# Altium PCB Diesel_control.PcbDoc
Units mm, origin at the board's own origin, x right, y up, seen from the top; angles counter-clockwise.
Board outline 132.63 x 61.4 mm, 2 copper layers (Top Layer, Bottom Layer); 96 components, 69 nets, 314 pads, 0 vias.
Unrouted connection lines stored in the file: 178.
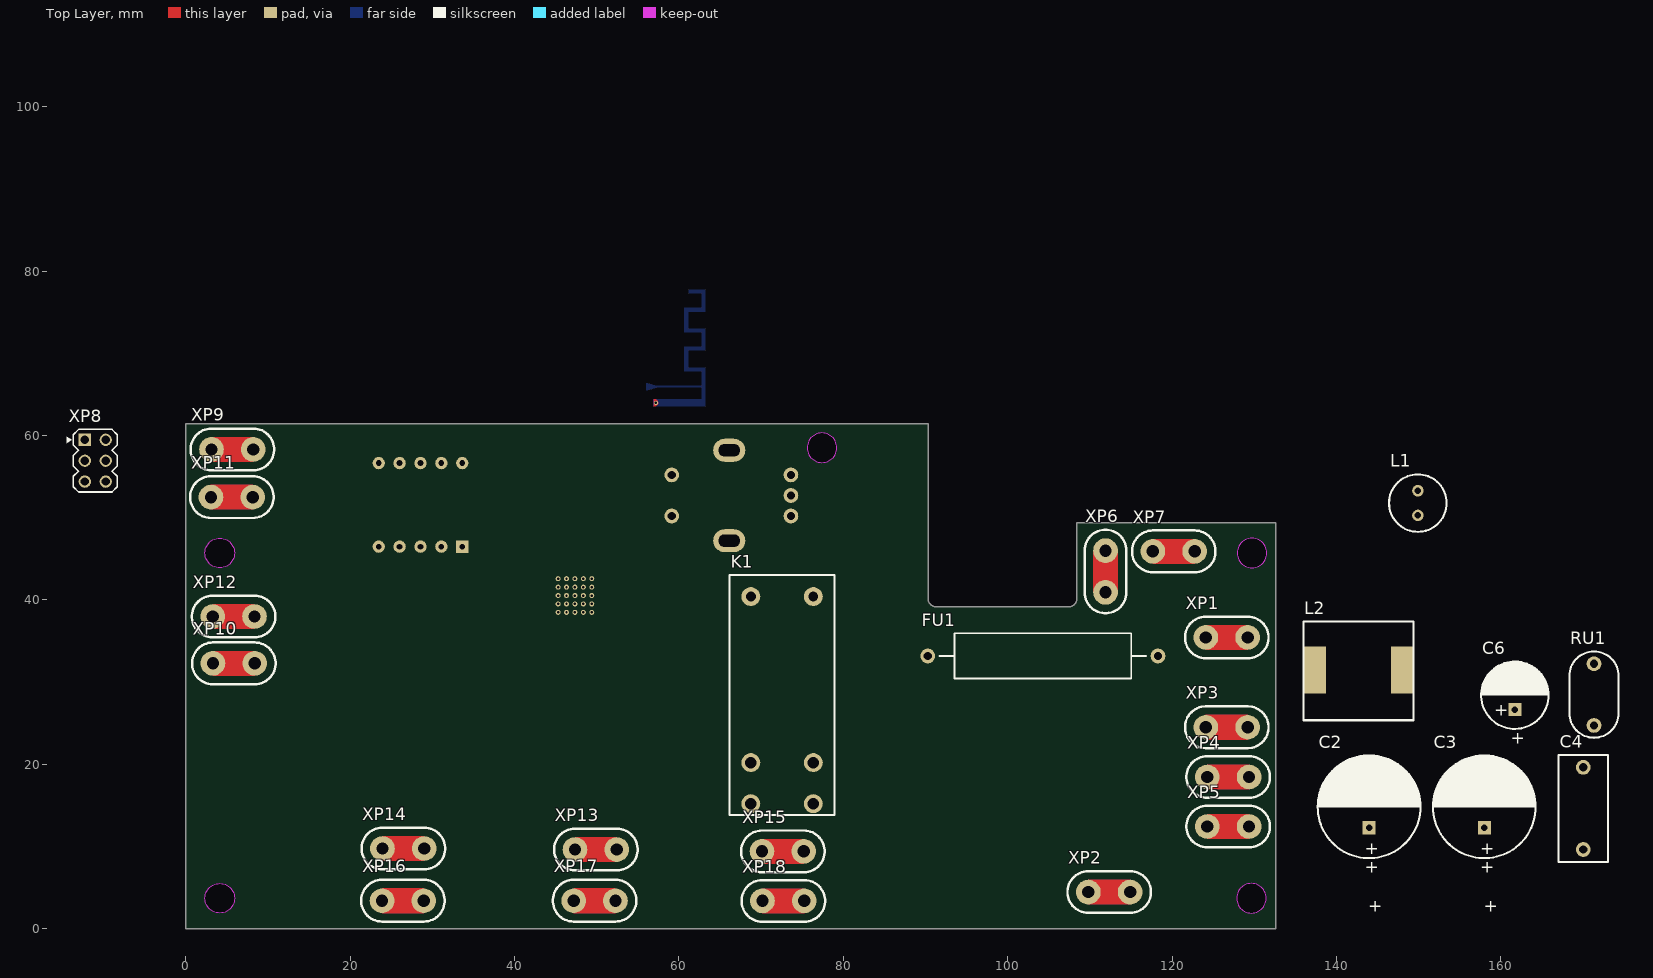
[diagram p0: Top Layer view]
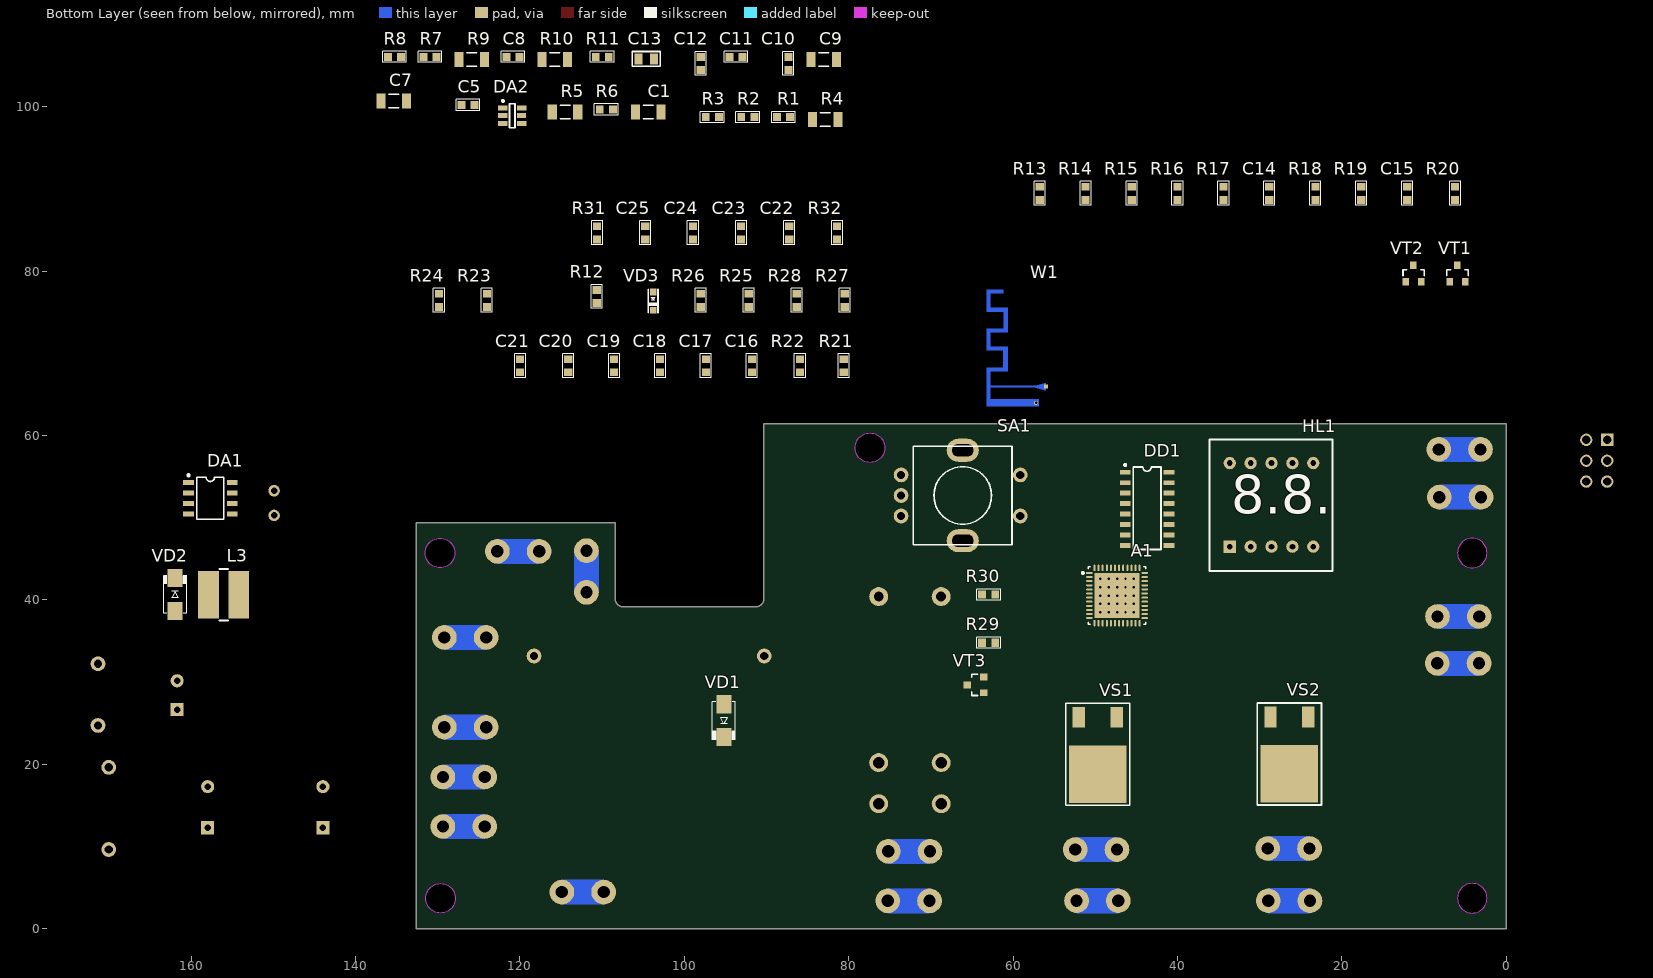
[diagram p1: Bottom Layer view, seen from below]

## Layer stack, top to bottom
Top Solder: solder mask 0.0102, Solder Resist, Dk 3.5
Top Layer: signal copper 0.0356
Dielectric 1: dielectric 0.32, FR-4, Dk 4.8
Bottom Layer: signal copper 0.0356
Bottom Solder: solder mask 0.0102, Solder Resist, Dk 3.5

## Board outline
-0.006,0.002 -0.006,61.402 90.304,61.402 90.304,40.155 ccw(c91.304,40.155) 91.304,39.155 107.421,39.155 ccw(c107.421,40.155) 108.421,40.155 108.421,49.402 132.627,49.402 132.627,0.002
cut-out: 127.843,3.7 ccw(c129.643,3.7) 129.643,1.9 ccw(c129.643,3.7) 131.443,3.7 ccw(c129.643,3.7) 129.643,5.5 ccw(c129.643,3.7)
cut-out: 127.912,45.7 ccw(c129.712,45.7) 129.712,43.9 ccw(c129.712,45.7) 131.512,45.7 ccw(c129.712,45.7) 129.712,47.5 ccw(c129.712,45.7)
cut-out: 75.6,58.5 ccw(c77.4,58.5) 77.4,56.7 ccw(c77.4,58.5) 79.2,58.5 ccw(c77.4,58.5) 77.4,60.3 ccw(c77.4,58.5)
cut-out: 4.143,43.9 cw(c4.143,45.7) 2.343,45.7 cw(c4.143,45.7) 4.143,47.5 cw(c4.143,45.7) 5.943,45.7 cw(c4.143,45.7)
cut-out: 4.143,1.9 cw(c4.143,3.7) 2.343,3.7 cw(c4.143,3.7) 4.143,5.5 cw(c4.143,3.7) 5.943,3.7 cw(c4.143,3.7)

## Design rules (kind name [scope] priority, off if disabled: settings)
Clearance [All] p1: gap=0.254 ignorepadtopadclearanceinfootprint=FALSE except(0: Arc-Hole Track-Hole SMDPad-Hole THPad-Hole Via-Hole Fill-Hole Poly-Hole Region-Hole Text-Hole)
PolygonConnect [All] p1: connectstyle=Relief reliefconductorwidth=0.254 reliefentries=4 polygonreliefangle="90 Angle" airgapwidth=0.254
RoutingVias [All] p1: holewidth=0.711 width=1.27 viastyle="Through Hole" minholewidth=0.711 minwidth=1.27 maxholewidth=0.711 maxwidth=1.27
SolderMaskExpansion [All] p1: expansion=0.102 istentingtop=FALSE
Width [All] p1: maxlimit=0.254 minlimit=0.254 preferedwidth=0.254
30 further rules are at their usual default settings.

## Components (designator, comment, footprint, x,y, rotation, side; value= is the part's Value field where it differs from the comment)
A1 "ESP32-PICO-D4" ESP32_PICO_D4 47.35,40.525 r180 bottom
C1 "56p" C1206 104.411,99.354 r180 bottom
C2 "10u 400v" CE12.5X20-P5.0 143.96,14.779 r0 top value=10u
C3 "10u 400v" CE12.5X20-P5.0 157.985,14.779 r0 top value=10u
C4 "0,1uF X2" CAP_FILM_6X13X12(PITCH=10mm) 170.025,14.625 r90 top value=100n
C5 "1u" C0603 126.309,100.204 r180 bottom
C6 "470u 16v" CE8x12MM-P3.5 161.7,28.4 r0 top value=470u
C7 "10u" C1206 135.35,100.7 r180 bottom
C8 "2.2u" C0603 120.831,106.054 r180 bottom
C9 "22u" C1206 83.054,105.754 r180 bottom
C10 "100n" C0603 87.329,105.254 r90 bottom
C11 "100n" C0603 93.705,106.054 r180 bottom
C12 "100n" C0603 98.005,105.254 r90 bottom
C13 "10u" C0805 104.63,105.804 r180 bottom
C14 "100n" C0603 28.823,89.454 r90 bottom
C15 "1u" C0603 12.047,89.454 r90 bottom
C16 "100n" C0603 91.769,68.479 r90 bottom
C17 "100n" C0603 97.369,68.479 r90 bottom
C18 "100n" C0603 102.944,68.479 r90 bottom
C19 "100n" C0603 108.545,68.479 r90 bottom
C20 "100n" C0603 114.12,68.479 r90 bottom
C21 "10u" C0603 119.97,68.479 r90 bottom
C22 "1u" C0603 87.237,84.654 r90 bottom
C23 "100n" C0603 93.087,84.654 r90 bottom
C24 "1u" C0603 98.937,84.654 r90 bottom
C25 "100n" C0603 104.762,84.654 r90 bottom
DA1 "SY50283" SO-8 157.658,52.365 r180 bottom
DA2 "TPMP1470GJ-Z" SOT-23-6 120.934,98.904 r180 bottom
DD1 "74HC595D" SO-16 43.7,51.075 r180 bottom
FU1 "10A" Axial_215 104.275,33.175 r180 top
HL1 "ARKLED_SN420362N" 7_seg_double_CK 33.64,46.475 r180 bottom locked
K1 "HF115F-HS3L1TF" HF115F-A 72.55,27.8 r270 top value=HF115F-L/12-HS3L1TF
L1 "680uH" PK0608 149.9,51.775 r0 top
L2 "470uH" GCRH129 137.325,31.45 r0 top
L3 "6.8uH" SCCD54 157.883,40.604 r180 bottom
R1 "4.3K" R0603 87.939,98.729 r180 bottom
R2 "20K" R0603 92.264,98.729 r180 bottom
R3 "18K" R0603 96.59,98.729 r180 bottom
R4 "2.0M" R1206 82.864,98.429 r180 bottom
R5 "2.0M" R1206 114.511,99.354 r180 bottom
R6 "100K" R0603 109.486,99.654 r180 bottom
R7 "75K" R0603 130.931,106.054 r180 bottom
R8 "40.2K" R0603 135.257,106.054 r180 bottom
R9 "51" R1206 125.856,105.754 r180 bottom
R10 "0.68R" R1206 115.756,105.754 r180 bottom value=0
R11 "13K" R0603 109.98,106.054 r180 bottom
R12 "10K" R0603 110.65,76.9 r90 bottom
R13 "200" R0603 56.749,89.454 r90 bottom
R14 "200" R0603 51.174,89.454 r90 bottom
R15 "200" R0603 45.574,89.454 r90 bottom
R16 "100K" R0603 39.999,89.454 r90 bottom
R17 "200" R0603 34.398,89.454 r90 bottom
R18 "200" R0603 23.223,89.454 r90 bottom
R19 "200" R0603 17.647,89.454 r90 bottom
R20 "200" R0603 6.222,89.454 r90 bottom
R21 "1K" R0603 80.593,68.479 r90 bottom
R22 "1K" R0603 85.919,68.479 r90 bottom
R23 "100K" R0603 124.017,76.429 r90 bottom
R24 "100K" R0603 129.843,76.429 r90 bottom
R25 "10K" R0603 92.166,76.429 r90 bottom
R26 "10K" R0603 97.991,76.429 r90 bottom
R27 "10K" R0603 80.49,76.429 r90 bottom
R28 "10K" R0603 86.316,76.429 r90 bottom
R29 "1K" R0603 62.971,34.789 r0 bottom
R30 "1K" R0603 62.971,40.639 r0 bottom
R31 "1K" R0603 110.613,84.654 r90 bottom
R32 "100K" R0603 81.411,84.654 r90 bottom
RU1 "10K471" Varistor_D10_P=7.5mm 171.325,28.475 r90 top
SA1 "EC11" EC11-20F 66.124,52.7 r270 bottom locked
VD1 "S1M" SMA_DIODE 95.175,25.3 r270 bottom
VD2 "ES1J" SMA_DIODE 161.958,40.654 r90 bottom
VD3 "1N4148" SOD-323_DIODE 103.791,76.354 r90 bottom value=1N4148WS
VS1 "BT136S" TO-252-3 49.7,22.25 r0 bottom
VS2 "BT136S" TO-252-3 26.375,22.3 r0 bottom
VT1 "2N7002K" SOT-23-3 5.921,79.704 r180 bottom
VT2 "2N7002K" SOT-23-3 11.271,79.704 r180 bottom
VT3 "2N7002" SOT-23-3 64.575,29.664 r90 bottom
W1 "2.4 GHz ANT" PIFA_2.4MHz 55.982,65.95 r90 bottom
XP1 "FASTON .250" 1217861-1 126.65,35.425 r180 top value=1217861-1
XP2 "FASTON .250" 1217861-1 112.35,4.45 r180 top value=1217861-1
XP3 "FASTON .250" 1217861-1 126.65,24.5 r180 top value=1217861-1
XP4 "FASTON .250" 1217861-1 126.825,18.45 r0 top value=1217861-1
XP5 "FASTON .250" 1217861-1 126.825,12.425 r180 top value=1217861-1
XP6 "FASTON .250" 1217861-1 111.9,43.45 r90 top value=1217861-1
XP7 "FASTON .250" 1217861-1 120.2,45.9 r180 top value=1217861-1
XP8 "PLD-6" PLD-6 -11.005,56.925 r0 top
XP9 "FASTON .250" 1217861-1 5.675,58.3 r180 top value=1217861-1
XP10 "FASTON .250" 1217861-1 5.85,32.275 r180 top value=1217861-1
XP11 "FASTON .250" 1217861-1 5.61,52.5 r180 top value=1217861-1
XP12 "FASTON .250" 1217861-1 5.825,37.975 r180 top value=1217861-1
XP13 "FASTON .250" 1217861-1 49.9,9.625 r180 top value=1217861-1
XP14 "FASTON .250" 1217861-1 26.475,9.75 r180 top value=1217861-1
XP15 "FASTON .250" 1217861-1 72.65,9.4 r180 top value=1217861-1
XP16 "FASTON .250" 1217861-1 26.425,3.4 r180 top value=1217861-1
XP17 "FASTON .250" 1217861-1 49.735,3.4 r180 top value=1217861-1
XP18 "FASTON .250" 1217861-1 72.7,3.375 r180 top value=1217861-1

## Footprints (in the part's own frame and the unit in brackets; to place one, negate y for a bottom-side part, rotate by r counter-clockwise, add the part's x,y. Pads: shape width x height; smd on the part's side, far side on the other; paste and mask are expansions set on the pad)
7_seg_double_CK [mm]
  rect 1.5x1.5 hole 0.7: 1(0,0)
  round 1.5 hole 0.7: 2(2.54,0) 3(5.08,0) 4(7.62,0) 5(10.16,0) 6(10.16,10.16) 7(7.62,10.16) 8(5.08,10.16) 9(2.54,10.16) 10(0,10.16)
  silkscreen extent -2.47,-2.97 12.52,13.03
1217861-1 [mm] "Ножевая клемма 6.35мм"
  round 3 hole 1.5: 1(-2.54,0) 1(2.54,0)
  Top Layer region: -2.54,1.5 2.54,1.5 2.54,-1.5 -2.54,-1.5
  Bottom Layer region: -2.54,1.5 2.54,1.5 2.54,-1.5 -2.54,-1.5
  silkscreen extent -5.08,-2.54 5.08,2.54, body extent -3.96,-1.54 3.96,1.54, height 10.5
Axial_215 [mm] "Thru-Hole; 2 Leads, 5.5x21.5mm"
  round 1.8 hole 1: 1(-14,0) 2(14,0)
  silkscreen extent -12.6,-2.75 12.6,2.76, body extent -14.4,-2.75 14.4,2.76, height 5.75
C0603 [mm] "Chip Ceramic Capacitor"
  rect 0.95x1 smd: 1(-0.8,0) 2(0.8,0)
  silkscreen extent -1.45,-0.67 1.45,0.67, body extent -0.87,-0.47 0.88,0.48, height 0.87
C0805 [mm] "Chip Ceramic Capacitor"
  rect 1x1.3 smd: 1(-0.95,0) 2(0.95,0)
  silkscreen extent -1.7,-0.9 1.7,0.9, body extent -1,-0.64 1,0.64, height 1.26
C1206 [mm] "Chip Ceramic Capacitor"
  rect 1.1x1.8 smd: 1(-1.55,0) 2(1.55,0)
  silkscreen extent -0.6,-0.82 0.6,0.82, body extent -1.6,-0.8 1.6,0.8, height 1.8
CAP_FILM_6X13X12(PITCH=10mm) [mm]
  round 1.8 hole 1: 1(-5,0) 2(5,0)
  silkscreen extent -6.5,-3 6.5,3, body extent -6.5,-3 6.5,3, height 12
CE8x12MM-P3.5 [mm] "Capacitor Radial aluminium capacitor"
  rect 1.6x1.6 hole 0.8: +(0,-1.75)
  round 1.6 hole 0.8: -(0,1.75)
  silkscreen extent -4.1,-4.1 4.1,4.1, body extent -4,-4 4,4, height 12.1
CE12.5X20-P5.0 [mm]
  rect 1.6x1.6 hole 0.8: +(0,-2.5)
  round 1.6 hole 0.8: -(0,2.5)
  silkscreen extent -6.25,-6.21 6.25,6.29, body extent -6.25,-6.25 6.25,6.25, height 20.6
EC11-20F [mm]
  round 1.8 hole 1: A(-2.5,-7.5) B(2.5,-7.5) C(0,-7.5) D(-2.5,7) E(2.5,7)
  oval 2.8x3.9 hole 1.5 slot 2.6 at 90 deg: GND(-5.5,0) GND(5.5,0)
  silkscreen extent -6,-6 6,6, body extent -6.2,-7.7 6.2,7.2, height 24.5
ESP32_PICO_D4 [mm]
  rect 0.785x0.242 smd paste+0 mask+0: 1(-3.363,2.75)
  rrect100% 0.785x0.242 smd paste+0 mask+0: 2(-3.363,2.25) 3(-3.363,1.75) 4(-3.363,1.25) 5(-3.363,0.75) 6(-3.363,0.25) 7(-3.363,-0.25) 8(-3.363,-0.75) 9(-3.363,-1.25) 10(-3.363,-1.75) 11(-3.363,-2.25) 12(-3.363,-2.75) 25(3.363,-2.75) 26(3.363,-2.25) 27(3.363,-1.75) 28(3.363,-1.25) 29(3.363,-0.75) 30(3.363,-0.25) 31(3.363,0.25) 32(3.363,0.75) 33(3.363,1.25) 34(3.363,1.75) 35(3.363,2.25) 36(3.363,2.75)
  rrect100% 0.242x0.785 smd paste+0 mask+0: 13(-2.75,-3.363) 14(-2.25,-3.363) 15(-1.75,-3.363) 16(-1.25,-3.363) 17(-0.75,-3.363) 18(-0.25,-3.363) 19(0.25,-3.363) 20(0.75,-3.363) 21(1.25,-3.363) 22(1.75,-3.363) 23(2.25,-3.363) 24(2.75,-3.363) 37(2.75,3.363) 38(2.25,3.363) 39(1.75,3.363) 40(1.25,3.363) 41(0.75,3.363) 42(0.25,3.363) 43(-0.25,3.363) 44(-0.75,3.363) 45(-1.25,3.363) 46(-1.75,3.363) 47(-2.25,3.363) 48(-2.75,3.363)
  round 0.6 hole 0.3 mask+0.102: 49(-2.05,0) 49(-2.05,1.025) 49(-2.05,2.05) 49(-2.05,-2.05) 49(-2.05,-1.025) 49(-1.025,-2.05) 49(-1.025,-1.025) 49(-1.025,0) 49(-1.025,1.025) 49(-1.025,2.05) 49(0,-2.05) 49(0,-1.025) 49(0,0) 49(0,1.025) 49(0,2.05) 49(1.025,-2.05) 49(1.025,-1.025) 49(1.025,0) 49(1.025,1.025) 49(1.025,2.05) 49(2.05,0) 49(2.05,-2.05) 49(2.05,-1.025) 49(2.05,1.025) 49(2.05,2.05)
  rect 5.5x5.5 smd paste-1000 mask+0: 49(0,0)
  silkscreen extent -4.28,-3.5 3.5,3.5, body extent -3.5,-3.5 3.5,3.5, height 1.04
GCRH129 [mm]
  rect 2.8x5.7 smd: 1(0,0) 2(10.675,0)
  silkscreen extent -1.33,-6.1 12.02,5.9
HF115F-A [mm]
  round 2.3 hole 1.4: 11(7.6,-3.8) 11(7.6,3.8) 14(12.6,3.8) 14(12.6,-3.8)
  round 2.3 hole 1.2: A1(-12.6,-3.8) A2(-12.6,3.8)
  silkscreen extent -15.2,-6.4 14,6.4, body extent -15.2,-6.4 13.8,6.3, height 15.7
PIFA_2.4MHz [mm] "WIFI PCB Antenna mod.2"
  rect 0.5x0.5 smd: 1(0,0)
  round 0.5 hole 0.3: 2(-1.99,1.226)
  Top Layer region: -0.126,6.767 0.125,6.767 0.125,1.227 -0.126,1.227
  Top Layer region: 11.307,6.767 11.811,6.767 11.811,5.155 11.307,5.155
  Top Layer region: 9.091,7.271 11.811,7.271 11.811,6.767 9.091,6.767
  Top Layer region: 9.091,6.767 9.595,6.767 9.595,4.652 9.091,4.652
  Top Layer region: 7.075,5.155 9.091,5.155 9.091,4.651 7.075,4.651
  Top Layer region: 6.572,6.767 7.075,6.767 7.075,4.651 6.572,4.651
  Top Layer region: 4.356,7.27 7.075,7.27 7.075,6.767 4.356,6.767
  Top Layer region: 4.356,6.767 4.86,6.767 4.86,4.651 4.356,4.651
  Top Layer region: 2.342,5.155 4.356,5.155 4.356,4.652 2.342,4.652
  Top Layer region: 1.838,6.767 2.342,6.767 2.342,4.652 1.838,4.652
  Top Layer region: -1.537,7.271 2.342,7.271 2.342,6.767 -1.537,6.767
  Top Layer region: -2.443,7.271 -1.537,7.271 -1.537,0.889 -2.443,0.889
  Top Layer pour cut-out: -3,7.745 12.425,7.745 12.425,1.22 -3,1.22
  Top Layer region: 0.126,1.241 0.424,0.199 0.424,0.041 -0.426,0.041 -0.426,0.199 -0.128,1.241
  Top Layer pour cut-out: -0.575,1.245 0.575,1.245 0.575,0 -0.575,0
  Top Layer lines w0.013: 2.342,5.155 4.356,5.155
  Bottom Layer pour cut-out: -3,7.745 12.425,7.745 12.425,1.22 -3,1.22
  Bottom Layer region: -2.4,0.945 -2.4,1.22 -2.213,1.407 -2.192,1.428 -2.143,1.461 -2.088,1.483 -2.03,1.495 -2,1.495 -1.964,1.495 -1.894,1.481 -1.828,1.454 -1.769,1.414 -1.744,1.389 -1.744,1.389 -1.575,1.22 -1.575,0.945
PK0608 [mm] "INDUCTANCE"
  round 1.4 hole 0.8: 1(0,-1.5) 2(0,1.5)
  silkscreen extent -3.5,-3.5 3.5,3.5, body extent -3.5,-3.5 3.5,3.5, height 10
PLD-6 [mm]
  rect 1.5x1.5 hole 1: 1(-1.27,2.54)
  round 1.5 hole 1: 2(1.27,2.54) 3(-1.27,0) 4(1.27,0) 5(-1.27,-2.54) 6(1.27,-2.54)
  silkscreen extent -3.47,-3.81 2.67,3.81, body extent -2.54,-3.81 2.54,3.81, height 8.7
R0603 [mm] "Chip Resistor"
  rect 0.95x1 smd: 1(-0.8,0) 2(0.8,0)
  silkscreen extent -1.45,-0.67 1.45,0.67, body extent -0.8,-0.4 0.8,0.4, height 0.3
R1206 [mm] "Chip Resistor"
  rect 1.1x1.8 smd: 1(-1.55,0) 2(1.55,0)
  silkscreen extent -0.6,-0.82 0.6,0.82, body extent -1.6,-0.8 1.6,0.8, height 1
SCCD54 [mm]
  rect 2.5x5.8 smd: 1(0,0) 2(3.7,0)
  silkscreen extent 1.35,-3.13 2.35,3.13
SMA_DIODE [mm]
  rect 2.2x1.8 smd: A(-2,0) C(2,0)
  silkscreen extent -2.3,-1.4 2.3,1.4, body extent -2.6,-1.3 2.6,1.3, height 2.42
SO-8 [mm] "SOIC, 8-Leads, Body 4.9x3.9mm, Pitch 1.27mm"
  rect 1.3x0.6 smd: 1(-2.667,1.905) 2(-2.667,0.635) 3(-2.667,-0.635) 4(-2.667,-1.905) 5(2.667,-1.905) 6(2.667,-0.635) 7(2.667,0.635) 8(2.667,1.905)
  silkscreen extent -2.79,-2.54 1.65,2.92, body extent -2.97,-2.45 2.97,2.45, height 1.45
SO-16 [mm] "SOIC, 16-Leads, Body 9.9x3.9mm, Pitch 1.27mm"
  rect 1.3x0.6 smd: 1(-2.667,4.445) 2(-2.667,3.175) 3(-2.667,1.905) 4(-2.667,0.635) 5(-2.667,-0.635) 6(-2.667,-1.905) 7(-2.667,-3.175) 8(-2.667,-4.445) 9(2.667,-4.445) 10(2.667,-3.175) 11(2.667,-1.905) 12(2.667,-0.635) 13(2.667,0.635) 14(2.667,1.905) 15(2.667,3.175) 16(2.667,4.445)
  silkscreen extent -2.79,-4.95 1.7,5.46, body extent -3,-5.1 3,5.1, height 1.7
SOD-323_DIODE [mm] "Площадка для диода в корпусе SOD-323"
  rect 0.8x0.8 smd: A(1.1,0) C(-1.1,0)
  silkscreen extent -1.4,-0.59 1.4,0.59, body extent -1.3,-0.67 1.3,0.68, height 1.1
SOT-23-3 [mm]
  rect 0.8x0.9 smd: X(-0.95,-1.012) Y(-0.025,1.012) Z(0.95,-1.012)
  silkscreen extent -1.3,-0.29 1.3,0.46, body extent -1.4,-1.23 1.39,1.2, height 1.09
SOT-23-6 [mm] "SOT23, 6-Leads, Body 2.9x1.3mm, Pitch 0.95mm, Lead Span 2.3mm, IPC Medium Density"
  rect 1.15x0.6 smd: 1(-1.137,0.95) 2(-1.137,0) 3(-1.137,-0.95) 4(1.138,-0.95) 5(1.131,0) 6(1.138,0.95)
  silkscreen extent -1.26,-1.45 0.34,1.92, body extent -1.41,-1.45 1.39,1.45, height 1.45
TO-252-3 [mm]
  rect 1.5x2.5 smd: X(-2.3,-3.45) Z(2.3,-3.45)
  rect 7x7 smd: Y(0,3.45)
  silkscreen extent -3.9,-5.15 3.9,7.25, body extent -3.37,-3.6 3.37,6.5, height 2.37
Varistor_D10_P=7.5mm [mm]
  round 1.8 hole 1: 1(-3.75,0) 2(3.75,0)
  silkscreen extent -5.25,-3 5.25,3, body extent -5.27,-2.91 5.27,2.77, height 12.5

## Part data
A1: library part 3638, "Bluetooth, WiFi 802.11b/g/n, Bluetooth v4.2 + EDR, Class 1, 2 and 3 Transceiver Module 2.4GHz ~ 2.5GHz  Surface Mount", Manufacturer=Expressif, Footprint Type=SMD, ID=3638, LCPN=C193707, MFPN=ESP32-PICO-D4, Supplier=LC, Symbol=ESP32_PICO_D4, Type=Modules, URL=https://lcsc.com/product-detail/Others_Espressif-Systems-ESP32-PICO-D4_C193707.html
C1: library part 3645, "56pF ±5% 1kV C0G,NP0 1206 Multilayer Ceramic Capacitors MLCC - SMD/SMT RoHS", Manufacturer="IHHEC(HOLY STONE ENTERPRISE CO., LTD)", Footprint Type=SMD, ID=3645, LCPN=C105999, MFPN=C1206N560J102T, Supplier=LC, Symbol=Capacitor, Type=Capacitors, URL=https://lcsc.com/product-detail/Multilayer-Ceramic-Capacitors-MLCC-SMD-SMT_IHHEC-HOLY-STONE-ENTERPRISE-CO-LTD-C1206N560J102T_C105999.html
C2 C3: library part 1407, "10u, 400v, Aluminium electrolitic capaсitor, radial, D=12.5mm, H=20mm, +105°C", Footprint Type=TH, ID=1407, Symbol=Capacitor_polarised, Type=Capacitors
C4: library part 3608, "Film Capacitor X2, 310V 0,1uF ±10% -40℃...+110℃", Manufacturer=KNSCHA, Footprint Type=TH, ID=3608, LCPN=C489079, MFPN=MPX104K31C3KN15600, Supplier=LC, Symbol=Capacitor, Type=Capacitors, URL=https://lcsc.com/product-detail/Suppression-Capacitors_KNSCHA-MPX104K31C3KN15600_C489079.html
C5 C15 C22 C24: library part 1246, "Cap Ceramic, 0603, ±10%, 50V, X7R (X5R), -55 +125C (-55 +85C)", Footprint Type=SMD, ID=1246, LCPN=C1592, MFPN=CL10A105KO8NNNC, Symbol=Capacitor, Type=Capacitors, URL=https://lcsc.com/product-detail/Multilayer-Ceramic-Capacitors-MLCC-SMD-SMT_Samsung-Electro-Mechanics-CL10A105KO8NNNC_C1592.html
C6: library part 1428, "470u, 16v, Aluminium electrolitic capaсitor, radial, D=8mm, H=12mm, +105°C", Footprint Type=TH, ID=1428, Symbol=Capacitor_polarised, Type=Capacitors
C7: library part 1383, "Cap Ceramic, 1206, ±10%, 25V, X7R (X5R), -55 +125C (-55 +85C)", Footprint Type=SMD, ID=1383, LCPN=C13585, MFPN=CL31A106KBHNNNE, Symbol=Capacitor, Type=Capacitors, URL=https://lcsc.com/product-detail/Multilayer-Ceramic-Capacitors-MLCC-SMD-SMT_Samsung-Electro-Mechanics-CL31A106KBHNNNE_C13585.html
C8: library part 1250, "Cap Ceramic, 0603, ±10%, 25V, X7R (X5R), -55 +125C (-55 +85C)", Footprint Type=SMD, ID=1250, Symbol=Capacitor, Type=Capacitors
C9: library part 1384, "Cap Ceramic, 1206, ±10%, 25V, X7R (X5R), -55 +125C (-55 +85C)", Footprint Type=SMD, ID=1384, Symbol=Capacitor, Type=Capacitors
C10 C11 C12 C14 C16 C17 C18 C19 C20 C23 C25: library part 1234, "Cap Ceramic, 0603, ±10%, 50V, X7R (X5R), -55 +125C (-55 +85C)", Footprint Type=SMD, ID=1234, LCPN=C187860, MFPN=0603B104K500NT, Symbol=Capacitor, Type=Capacitors, URL=https://lcsc.com/product-detail/Multilayer-Ceramic-Capacitors-MLCC-SMD-SMT_YAGEO-CC0603KRX7R9BB104_C14663.html
C13: library part 1331, "Cap Ceramic, 0805, ±10%, 50V, X7R (X5R), -55 +125C (-55 +85C)", Footprint Type=SMD, ID=1331, LCPN=C17024, Symbol=Capacitor, Type=Capacitors
C21: library part 1258, "Cap Ceramic, 0603, ±10%, 6.3V, X7R (X5R), -55 +125C (-55 +85C)", Footprint Type=SMD, ID=1258, Symbol=Capacitor, Type=Capacitors
DA1: library part 3641, "Buck Regulator", Manufacturer="Silergy Corp", Footprint Type=SMD, ID=3641, LCPN=C492740, MFPN=SY50283FAC, Supplier=LC, Symbol=SY50283, Type=Microschemes, URL=https://lcsc.com/product-detail/LED-Drivers_Silergy-Corp-SY50283FAC_C492740.html
DA2: library part 3646, "SOT23-6 DC-DC Converters RoHS", Manufacturer="TECH PUBLIC", Footprint Type=SMD, ID=3646, LCPN=C558426, MFPN=TPMP1470GJ-Z, Supplier=LC, Symbol=TPMP1470GJ-Z, Type=Microschemes, URL=https://lcsc.com/product-detail/DC-DC-Converters_TECH-PUBLIC-TPMP1470GJ-Z_C558426.html
DD1: library part 3557, "Shift Register Serial to parallel, serial SOIC-16_150mil", Manufacturer="Shenzhen Fuman Elec", Footprint Type=SMD, ID=3557, LCPN=C2798023, MFPN=74HC595D,118, Supplier=LC, Symbol=74HC595D, Type=Microschemes, URL=https://lcsc.com/product-detail/74-Series_Nexperia-74HC595D-118_C5947.html
FU1: library part 3611, "Glass Tube Fuse Delayed blow/Slow Blow 10A 250V Axial,5x20mm", Manufacturer=Littelfuse, Footprint Type=TH, ID=3611, LCPN=C142774, MFPN=0218010.MXEP, Supplier=LC, Symbol=Fuse, Type=Fuses, URL=https://lcsc.com/product-detail/Cartridge-Fuses_Littelfuse-0218010-MXEP_C142774.html
HL1: library part 3577, "2 0.36''(9.14mm) Cathode(Negative electrode) Red 633nm Through Hole Led Segment Display RoHS", Manufacturer="ARKLED(Wuxi ARK Tech Elec)", Footprint Type=TH, ID=3577, LCPN=C193138, MFPN=SN420362N, Supplier=LC, Symbol=7_segment_double_CK, Type=Displays, URL=https://lcsc.com/product-detail/Led-Segment-Display_ARKLED-Wuxi-ARK-Tech-Elec-SN420362N_C193138.html
K1: library part 1496, "Miniature High Power Latching Relay, 1 Coil, 20A, 5VDC", Manufacturer="HONGFA RELAY", Footprint Type=TH, ID=1496, MFPN=HF115F-L/5-HS3L1TF, Supplier=BIG, Symbol=RELAY_POL_L1_1A, Type=Relays
L1: library part 3642, "680uH ±20% 250mA 2.5Ω Power Inductors RoHS", Manufacturer="SXN(Shun Xiang Nuo Elec)", Footprint Type=TH, ID=3642, LCPN=C400306, MFPN=PK0608-681MB, Supplier=LC, Symbol=Drossel, Type=Inductors, URL=https://lcsc.com/product-detail/Power-Inductors_SXN-Shun-Xiang-Nuo-Elec-PK0608-681MB_C400306.html
L2: library part 3643, "470uH ±20% 1A 600mΩ SMD,12.3x12.3x10mm(max) Power Inductors RoHS", Manufacturer=GLE, Footprint Type=SMD, ID=3643, LCPN=C439430, MFPN=GCRH129-471MC, Supplier=LC, Symbol=Drossel, Type=Inductors, URL=https://lcsc.com/product-detail/Power-Inductors_GLE-GCRH129-471MC_C439430.html
L3: library part 3647, "6.8uH ±20% 2A 70mΩ SMD,5.8x5.2x4.5mm Power Inductors RoHS", Manufacturer=Yanchuang, Footprint Type=SMD, ID=3647, LCPN=C532871, MFPN=SCCD54-6R8MT, Supplier=LC, Symbol=Drossel, Type=Inductors
R1: library part 88, "Res, 0603, 1%, 1/10W", Manufacturer="FH(Guangdong Fenghua Advanced Tech)", Footprint Type=SMD, ID=88, LCPN=C310281, MFPN=RS-03K4301FT, Supplier=JLC, Symbol=Resistor, Type=Resistors, URL=https://lcsc.com/product-detail/Chip-Resistor-Surface-Mount_FH-Guangdong-Fenghua-Advanced-Tech-RS-03K4301FT_C310281.html
R2: library part 104, "Res, 0603, 1%, 1/10W", Manufacturer=YAGEO, Footprint Type=SMD, ID=104, LCPN=C105575, MFPN=RC0603FR-0720KL, Supplier=JLC, Symbol=Resistor, Type=Resistors, URL=https://lcsc.com/product-detail/Chip-Resistor-Surface-Mount_20KR-2002-1_C105575.html
R3: library part 103, "Res, 0603, 1%, 1/10W", Manufacturer="FH(Guangdong Fenghua Advanced Tech)", Footprint Type=SMD, ID=103, LCPN=C140113, MFPN=RS-03K1802FT, Supplier=JLC, Symbol=Resistor, Type=Resistors, URL=https://lcsc.com/product-detail/Chip-Resistor-Surface-Mount_FH-Guangdong-Fenghua-Advanced-Tech-RS-03K1802FT_C140113.html
R4 R5: library part 490, "Res, 1206, 5%, 1/4W", Footprint Type=SMD, ID=490, Symbol=Resistor_1/4W, Type=Resistors
R6 R16 R23 R24 R32: library part 121, "Res, 0603, 1%, 1/10W", Manufacturer="UNI-ROYAL(Uniroyal Elec)", Footprint Type=SMD, ID=121, LCPN=C25803, MFPN=0603WAF1003T5E, Supplier=JLC, Symbol=Resistor, Type=Resistors, URL=https://lcsc.com/product-detail/Chip-Resistor-Surface-Mount_UNI-ROYAL-Uniroyal-Elec-0603WAF1003T5E_C25803.html
R7: library part 118, "Res, 0603, 1%, 1/10W", Manufacturer="UNI-ROYAL(Uniroyal Elec)", Footprint Type=SMD, ID=118, LCPN=C23242, MFPN=0603WAF7502T5E, Supplier=JLC, Symbol=Resistor, Type=Resistors, URL=https://lcsc.com/product-detail/Chip-Resistor-Surface-Mount_UNI-ROYAL-Uniroyal-Elec-0603WAF7502T5E_C23242.html
R8: library part 3649, "Res, 0603, 1%, 1/10W", Manufacturer="UNI-ROYAL(Uniroyal Elec)", Footprint Type=SMD, ID=3649, LCPN=C12447, MFPN=0603WAF4022T5E, Supplier=LC, Symbol=Resistor, Type=Resistors
R9: library part 380, "Res, 1206, 1%, 1/4W", Footprint Type=SMD, ID=380, Symbol=Resistor_1/4W, Type=Resistors
R10: library part 3572, "Res, 1206, 5%, 1/4W", Manufacturer="UNI-ROYAL(Uniroyal Elec)", Footprint Type=SMD, ID=3572, LCPN=C38869, MFPN=1206W4J0000T5E, Supplier=JLC, Symbol=Resistor_1/4W, Type=Resistors, URL=https://lcsc.com/product-detail/Chip-Resistor-Surface-Mount_UNI-ROYAL-Uniroyal-Elec-1206W4J0000T5E_C38869.html
R11: library part 100, "Res, 0603, 1%, 1/10W", Manufacturer="UNI-ROYAL(Uniroyal Elec)", Footprint Type=SMD, ID=100, LCPN=C22797, MFPN=0603WAF1302T5E, Supplier=JLC, Symbol=Resistor, Type=Resistors, URL=https://lcsc.com/product-detail/Chip-Resistor-Surface-Mount_UNI-ROYAL-Uniroyal-Elec-0603WAF1302T5E_C22797.html
R12 R25 R26 R27 R28: library part 97, "Res, 0603, 1%, 1/10W", Manufacturer="FH(Guangdong Fenghua Advanced Tech)", Footprint Type=SMD, ID=97, LCPN=C115324, MFPN=RS-03K1002FT, Supplier=JLC, Symbol=Resistor, Type=Resistors, URL=https://lcsc.com/product-detail/Chip-Resistor-Surface-Mount_FH-Guangdong-Fenghua-Advanced-Tech-RS-03K1002FT_C115324.html
R13 R14 R15 R17 R18 R19 R20: library part 56, "Res, 0603, 1%, 1/10W", Manufacturer="UNI-ROYAL(Uniroyal Elec)", Footprint Type=SMD, ID=56, LCPN=C25217, MFPN=0603WAJ0201T5E, Supplier=JLC, Symbol=Resistor, Type=Resistors, URL=https://lcsc.com/product-detail/Chip-Resistor-Surface-Mount_UNI-ROYAL-Uniroyal-Elec-0603WAJ0201T5E_C25217.html
R21 R22 R29 R30 R31: library part 73, "Res, 0603, 1%, 1/10W", Manufacturer="FH(Guangdong Fenghua Advanced Tech)", Footprint Type=SMD, ID=73, LCPN=C115325, MFPN=RS-03K1002FT, Supplier=JLC, Symbol=Resistor, Type=Resistors, URL=https://lcsc.com/product-detail/Chip-Resistor-Surface-Mount_FH-Guangdong-Fenghua-Advanced-Tech-RS-03K1001FT_C115325.html
RU1: library part 1436, "VARISTOR, 385VDC, 300VAC, 0.4W, D10mm", Footprint Type=TH, ID=1436, MFPN="VDR-10K471KH， -40/125度", Supplier=BIG, Symbol=Varistor, Type=Resistors
SA1: library part 3626, "Metal Shaft Type EC11 Series, 11mm Size", Footprint Type=TH, ID=3626, Supplier=BIG, Symbol=EC11, Type=Switches
VD1: library part 1475, "Rectifier Diode, 1А, 800V, 1.8us", Footprint Type=SMD, ID=1475, LCPN=C64915, MFPN=S1M, Supplier=JLC, Symbol=Diode, Type=Diodes, URL=https://lcsc.com/product-detail/Diodes-General-Purpose_MDD-Microdiode-Electronics-S1M_C64915.html
VD2: library part 3644, "600V 1A 1.7V 1A SMA(DO-214AC) Diodes - General Purpose RoHS", Manufacturer=BORN, Footprint Type=SMD, ID=3644, LCPN=C266561, MFPN=ES1J, Supplier=LC, Symbol=Diode, Type=Diodes, URL=https://lcsc.com/product-detail/Diodes-General-Purpose_BORN-ES1J_C266561.html
VD3: library part 1464, "Small Signal Fast Switching Diode, 150mA, 75V", Footprint Type=SMD, ID=1464, LCPN=C108805, MFPN=1N4148WS, Supplier=JLC, Symbol=Diode, Type=Diodes, URL=https://lcsc.com/product-detail/Switching-Diode_Shandong-Jingdao-Microelectronics-1N4148WS_C108805.html
VS1 VS2: library part 3596, "Two-way thyristor 600V 6A 1.45V 10mA TO-252-2(DPAK)", Manufacturer="Changjiang Electronics Tech (CJ)", Footprint Type=SMD, ID=3596, LCPN=C23427, MFPN=BT136S, Supplier=LC, Symbol=Triac, Type=Diodes, URL=https://lcsc.com/product-detail/Thyristors-TRIACs_Changjiang-Electronics-Tech-CJ-BT136S_C23427.html
VT1 VT2: library part 1471, "HEXFET Power MOSFET N-CH", Footprint Type=SMD, ID=1471, LCPN=C38161, MFPN=2N7002K, Supplier=LC, Symbol=N-MOS, Type=Transistors, URL=https://lcsc.com/product-detail/MOSFET_Changjiang-Electronics-Tech-CJ-2N7002K_C38161.html
VT3: library part 1470, "HEXFET Power MOSFET N-CH", Footprint Type=SMD, ID=1470, LCPN=C8545, MFPN=GM7002E, Supplier=JLC, Symbol=N-MOS, Type=Transistors
W1: library part 3625, "2.4 GHz PCB Trace WI-FI Anthenna 50 Ohm", ID=3625, Symbol=PIFA_ANTHENNA, Type=Anthennas
XP1 XP2 XP3 XP4 XP5 XP6 XP7 XP9 XP10 XP11 XP12 XP13 XP14 XP15 XP16 XP17 XP18: library part 1446, "TERMINAL, TAB, 6.35MM x 0.81MM, SOLDER", Footprint Type=TH, ID=1446, MFPN=1217861-1, Supplier=BIG, Symbol=TERMINAL_TAB, Type=Connectors
XP8: library part 3581, "2x3 Male pld pins 2.54", Footprint Type=TH, ID=3581, Symbol=MALE_6PIN, Type=Connectors

## Nets (pads, with @x,y where several pads share a name; then routed paths per layer and width w, separated by ;. In a path a pad name is that pad's centre, name@x,y a point inside that pad or via, vN(x,y) a via of type N, cw(c..) or ccw(c..) an arc to the next point about the centre after c; other vN are vias at no path point)
3.3V: DD1.16 R12.1 R16.2 R25.2 R26.2 XP8.1
12V: C6.+ C7.2 C9.2 C10.2 DA2.3 K1.A1 L2.2 R3.2 R6.1 VD3.C
ACL: FU1.1 K1.11 VS1.X VS2.X XP1.1
ADC_NTC: A1.8 C25.2 R26.1 R28.2
ADC_PHOTO: A1.5 C23.2 R25.1 R27.2
BOOT: A1.23 XP8.5
COIL: VS2.Y XP14.1
DIG1: A1.15 R22.1
DIG2: A1.16 R21.1
EN: A1.9 C14.2 R16.1 XP8.6
ENC_A: A1.12 SA1.A
ENC_B: A1.13 SA1.B
ENC_PUSH: A1.14 SA1.D
GND: A1.49 C2.- C3.- C4.1 C6.- C7.1 C9.1 C10.1 C11.1 C12.1 C13.1 C14.1 C15.1 C16.1 C17.1 C18.1 C19.1 C20.1 C21.1 C22.1 C23.1 C24.1 C25.1 DA2.1 DD1.8 DD1.13 R9.1 R11.1 R23.1 R24.1 R32.1 RU1.1 SA1.C SA1.E SA1.GND VD2.A VT1.Z VT2.Z VT3.Z W1.1 XP2.1 XP8.3 XP11.1 XP12.1 XP16.1 XP17.1 XP18.1
LED_CL: DD1.12
LED_DATA: A1.18 A1.20 DD1.14
LED_SCK: A1.17 DD1.11
MCU_COIL: A1.38 R30.1
MCU_MOTOR: A1.39 R31.2
MCU_VALVE: A1.34 R29.1
MOTOR: K1.14 XP15.1
NetA1_1: A1.1 A1.3 A1.4 A1.19 A1.26 A1.37 A1.43 A1.46 C16.2 C17.2 C18.2 C19.2 C20.2 C21.2
NetA1_2: A1.2 W1.2
NetC1_1: C1.1 R9.2
NetC1_2: C1.2 C8.1 DA1.1 L2.1 R1.1 R10.1 VD2.C
NetC2_+: C2.+ L1.1 VD1.C
NetC3_+: C3.+ DA1.5 DA1.6 DA1.7 DA1.8 L1.2 R4.2
NetC4_2: C4.2 FU1.2 RU1.2 VD1.A
NetC5_1: C5.1 DA2.6
NetC5_2: C5.2 DA2.2 L3.1
NetC8_2: C8.2 DA1.3 R5.1
NetC11_2: C11.2 DA2.5 R6.2
NetC12_2: C12.2 C13.2 L3.2 R8.2
NetC15_2: C15.2 DD1.10 R12.2
NetDA1_2: DA1.2 R10.2
NetDA1_4: DA1.4 R1.2 R2.1
NetDA2_4: DA2.4 R7.1
NetDD1_1: DD1.1 R13.2
NetDD1_2: DD1.2 R14.2
NetDD1_3: DD1.3 R15.2
NetDD1_4: DD1.4 R17.2
NetDD1_5: DD1.5 R18.2
NetDD1_6: DD1.6 R19.2
NetDD1_7: DD1.7 R20.2
NetHL1_1: HL1.1 R20.1
NetHL1_3: HL1.3 R13.1
NetHL1_4: HL1.4 R19.1
NetHL1_5: HL1.5 VT1.Y
NetHL1_6: HL1.6 R17.1
NetHL1_7: HL1.7 R18.1
NetHL1_8: HL1.8 R15.1
NetHL1_9: HL1.9 R14.1
NetHL1_10: HL1.10 VT2.Y
NetK1_A2: K1.A2 VD3.A VT3.Y
NetR2_2: R2.2 R3.1
NetR4_1: R4.1 R5.2
NetR7_2: R7.2 R8.1 R11.2
NetR21_2: R21.2 R23.2 VT1.X
NetR22_2: R22.2 R24.2 VT2.X
NetR29_2: R29.2 VS1.Z
NetR30_2: R30.2 VS2.Z
NetR31_1: R31.1 R32.2 VT3.X
NTC: C24.2 R28.1 XP10.1
PHOTO: C22.2 R27.1 XP9.1
PWR_GND: XP3.1 XP4.1 XP5.1
RX0: A1.40 XP8.4
TEMP_FUSE: XP6.1 XP7.1
TX0: A1.41 XP8.2
VALVE: VS1.Y XP13.1
pads on no net: A1.6 A1.7 A1.10 A1.11 A1.21 A1.22 A1.24 A1.25 A1.27 A1.28 A1.29 A1.30 A1.31 A1.32 A1.33 A1.35 A1.36 A1.42 A1.44 A1.45 A1.47 A1.48 DD1.9 DD1.15 HL1.2

## Silkscreen, mask and mechanical layers (free items; w line width, h text height)
Mechanical 1:
  circle w0.2: c129.643,3.7 r1.8
  circle w0.2: c129.712,45.7 r1.8
  circle w0.2: c77.4,58.5 r1.8
  circle w0.2: c4.143,45.7 r1.8
  circle w0.2: c4.143,3.7 r1.8
  lines w0.2: -0.006,0.002 132.627,0.002 132.627,49.402 108.421,49.402 108.421,40.155 cw(c107.421,40.155) 107.421,39.155 91.304,39.155 cw(c91.304,40.155) 90.304,40.155 90.304,61.402 -0.006,61.402 -0.006,0.002

## Text inside footprints (layer, text, board x,y; h text height)
C2: Top Overlay "+" at 143.46,9.079 h1.5; Top Overlay "+" at 143.86,2.079 h1.5; Top Overlay "+" at 143.46,6.779 h1.5
C3: Top Overlay "+" at 157.485,9.079 h1.5; Top Overlay "+" at 157.885,2.079 h1.5; Top Overlay "+" at 157.485,6.779 h1.5
C6: Top Overlay "+" at 161.2,22.5 h1.5; Top Overlay "+" at 159.2,25.9 h1.5
HL1: Bottom Overlay "8.8." at 33.434,48.975 h8